# Altium PCB Sample_FPC_v1_new.PcbDoc
Units mm, origin at the board's own origin, x right, y up, seen from the top; angles counter-clockwise.
Board outline 5 x 70.99 mm, 2 copper layers (Top Layer, Bottom Layer); 2 components, 5 nets, 22 pads, 0 vias.
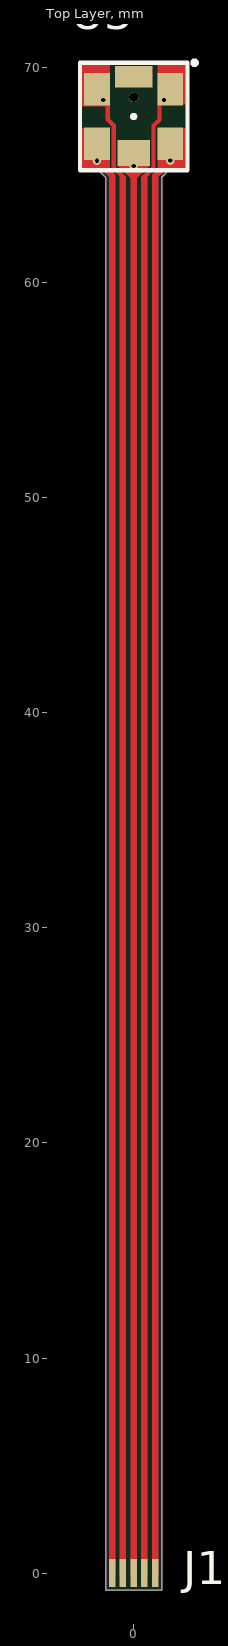
[diagram p0: Top Layer view]
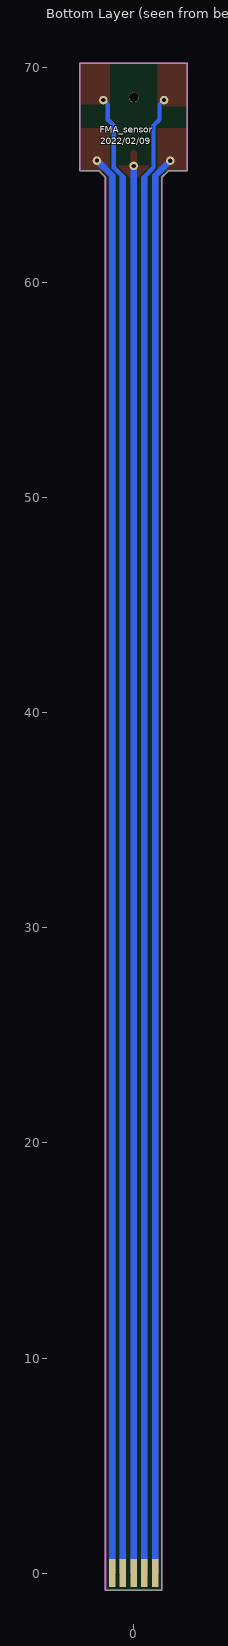
[diagram p1: Bottom Layer view, seen from below]

## Layer stack, top to bottom
Top Solder: solder mask 0.0102, Solder Resist, Dk 3.5
Top Layer: signal copper 0.0356
Dielectric 1: dielectric 0.32, FR-4, Dk 4.8
Bottom Layer: signal copper 0.0356
Bottom Solder: solder mask 0.0102, Solder Resist, Dk 3.5

## Board outline
-1.306,64.245 -1.306,64.902 -1.603,65.2 -2.5,65.2 -2.5,70.2 2.5,70.2 2.5,65.2 1.6,65.2 1.31,64.91 1.31,64.179 1.31,-0.792 -1.305,-0.792

## Design rules (kind name [scope] priority, off if disabled: settings)
Clearance [All] p1: gap=0.075 ignorepadtopadclearanceinfootprint=FALSE
PolygonConnect [All] p1: connectstyle=Relief reliefconductorwidth=0.254 reliefentries=4 polygonreliefangle="90 Angle" airgapwidth=0.254
RoutingVias [All] p1: holewidth=0.2 width=0.4 viastyle="Through Hole" minholewidth=0.2 minwidth=0.4 maxholewidth=0.2 maxwidth=0.4
SolderMaskExpansion [All] p1: expansion=0.102 istentingtop=FALSE
Width [All] p1: maxlimit=1.27 minlimit=0.075 preferedwidth=0.075
30 further rules are at their usual default settings.

## Components (designator, comment, footprint, x,y, rotation, side; value= is the part's Value field where it differs from the comment)
J1 "FPC0.5-5P-line" FPC0.5-5P-Line 0,-0.043 r180 top
U3 "FMAMSDXX005WCSC3" FMA_MICROFORCE_6 1.7,69 r270 top

## Footprints (in the part's own frame and the unit in brackets; to place one, negate y for a bottom-side part, rotate by r counter-clockwise, add the part's x,y. Pads: shape width x height; smd on the part's side, far side on the other; paste and mask are expansions set on the pad)
FMA_MICROFORCE_6 [mm]
  round 0.45 hole 0.45 unplated: 0(0.38,-1.7)
  rect 1.5x1.2 smd: 1(0,0) 2(2.54,0) 3(2.54,-3.4) 4(0,-3.4)
  rect 1.2x1.5 smd: 5(2.97,-1.7)
  rect 1x1.73 smd: 6(-0.59,-1.7)
  silkscreen extent -1.3,-4.2 3.77,1.2, body extent -1.23,-4.2 3.77,0.8, height 2.55
FPC0.5-5P-Line [mm]
  rect 0.3x1.3 smd: 1(-1,-0.043) 2(-0.5,-0.043) 3(0,-0.043) 4(0.5,-0.043) 5(1,-0.043)
  rect 0.3x1.3 smd far side: 1(-1,-0.043) 2(-0.5,-0.043) 3(0,-0.043) 4(0.5,-0.043) 5(1,-0.043)

## Part data
U3: "Force Range: 5N  / Output: SPI  / FMA Series Force Sensor, compensated/amplified, mechanically  / coupled, sphere contact element, sensor short and open  / diagnostics, 5 N force range, compression force type, SPI digital  / output, 20% to 80% transfer function, 3.3 V ±10% supply voltage"

## Free pads (board coordinates)
  round 0.4 hole 0.2: GND(-1.707,65.678) MISO(0,65.433) SCLK(-1.412,68.495) SS(1.707,65.68) VCC(1.412,68.495)

## Nets (pads, with @x,y where several pads share a name; then routed paths per layer and width w, separated by ;. In a path a pad name is that pad's centre, name@x,y a point inside that pad or via, vN(x,y) a via of type N, cw(c..) or ccw(c..) an arc to the next point about the centre after c; other vN are vias at no path point)
GND: J1.5 pad.GND U3.3 | length 131.9
  Top Layer w0.3: U3.3 U3.3@-1.25,66.01 ; -1.25,65.223 -1.139,65.11 -1,64.971 J1.5@-1,0
  Bottom Layer w0.3: pad.GND -1,64.971 J1.5@-1,0
MISO: J1.3 pad.MISO U3.5 | length 131.5
  Top Layer w0.3: J1.3@0,0 U3.5
  Bottom Layer w0.3: J1.3@0,0 pad.MISO
SCLK: J1.4 pad.SCLK U3.4 | length 138.3
  Top Layer w0.2: U3.4 -1.2,68.5 -1.2,67.583 -0.925,67.308 -0.925,65.358 -0.866,65.299 -0.5,64.933
  Top Layer w0.3: J1.4@-0.5,-0.08 -0.5,0 -0.5,64.879
  Bottom Layer w0.2: pad.SCLK -1.2,68.283 -1.2,67.583 -0.925,67.308 -0.925,65.358 ; -0.866,65.299 -0.5,64.933
  Bottom Layer w0.3: J1.4@-0.5,0 -0.5,64.879
SS: J1.1 pad.SS U3.2 | length 132.7
  Top Layer w0.3: J1.1@1,0 1,64.973 1.25,65.223 1.25,66.01 U3.2
  Bottom Layer w0.3: J1.1@1,0 1,64.973 pad.SS
VCC: J1.2 pad.VCC U3.1 | length 138.3
  Top Layer w0.2: 0.5,64.933 0.925,65.358 0.925,67.308 1.2,67.583 1.2,68.5 U3.1
  Top Layer w0.3: J1.2@0.5,0 0.5,64.877
  Bottom Layer w0.2: 0.5,64.933 0.925,65.358 0.925,67.308 1.2,67.583 1.2,68.283 pad.VCC
  Bottom Layer w0.3: J1.2@0.5,0 0.5,64.877
pads on no net: U3.0 U3.6

## Keep-outs
Keep-Out Layer:
  the board outline again, w0.075

## Other copper
Top Layer:
  rectangle net GND: -2.5,65.2 -1.1,67.2
  rectangle net SS: 1.1,65.2 2.5,67.2
  rectangle net VCC: 1.1,68.3 2.5,70.2
  rectangle net SCLK: -2.5,68.2 -1.1,70.2
  region net MISO: -0.75,65.431 0.003,64.717 0.749,65.435

## Silkscreen, mask and mechanical layers (free items; w line width, h text height)
Bottom Overlay:
  text "FMA_sensor" at 1.57,66.973 h0.3
  text "2022/02/09" at 1.558,66.439 h0.3
Top Solder:
  rectangle: 1.1,68.3 2.5,70.2
  rectangle: 1.1,65.2 2.5,67.2
  rectangle: -2.5,65.2 -1.1,67.2
  rectangle: -2.5,68.2 -1.1,70.2
  region: -0.719,65.401 0.686,65.375 0.295,64.998 -0.294,64.998